# Altium PCB battery_board_v2(1).PcbDoc (part 1 of 2)
Units mm, origin at the board's own origin, x right, y up, seen from the top; angles counter-clockwise.
Board outline 90.17 x 96.01 mm, 4 copper layers (F.Cu, In1.Cu, In2.Cu, B.Cu); 129 components, 185 nets, 704 pads, 113 vias.
Unrouted connection lines stored in the file: 18.
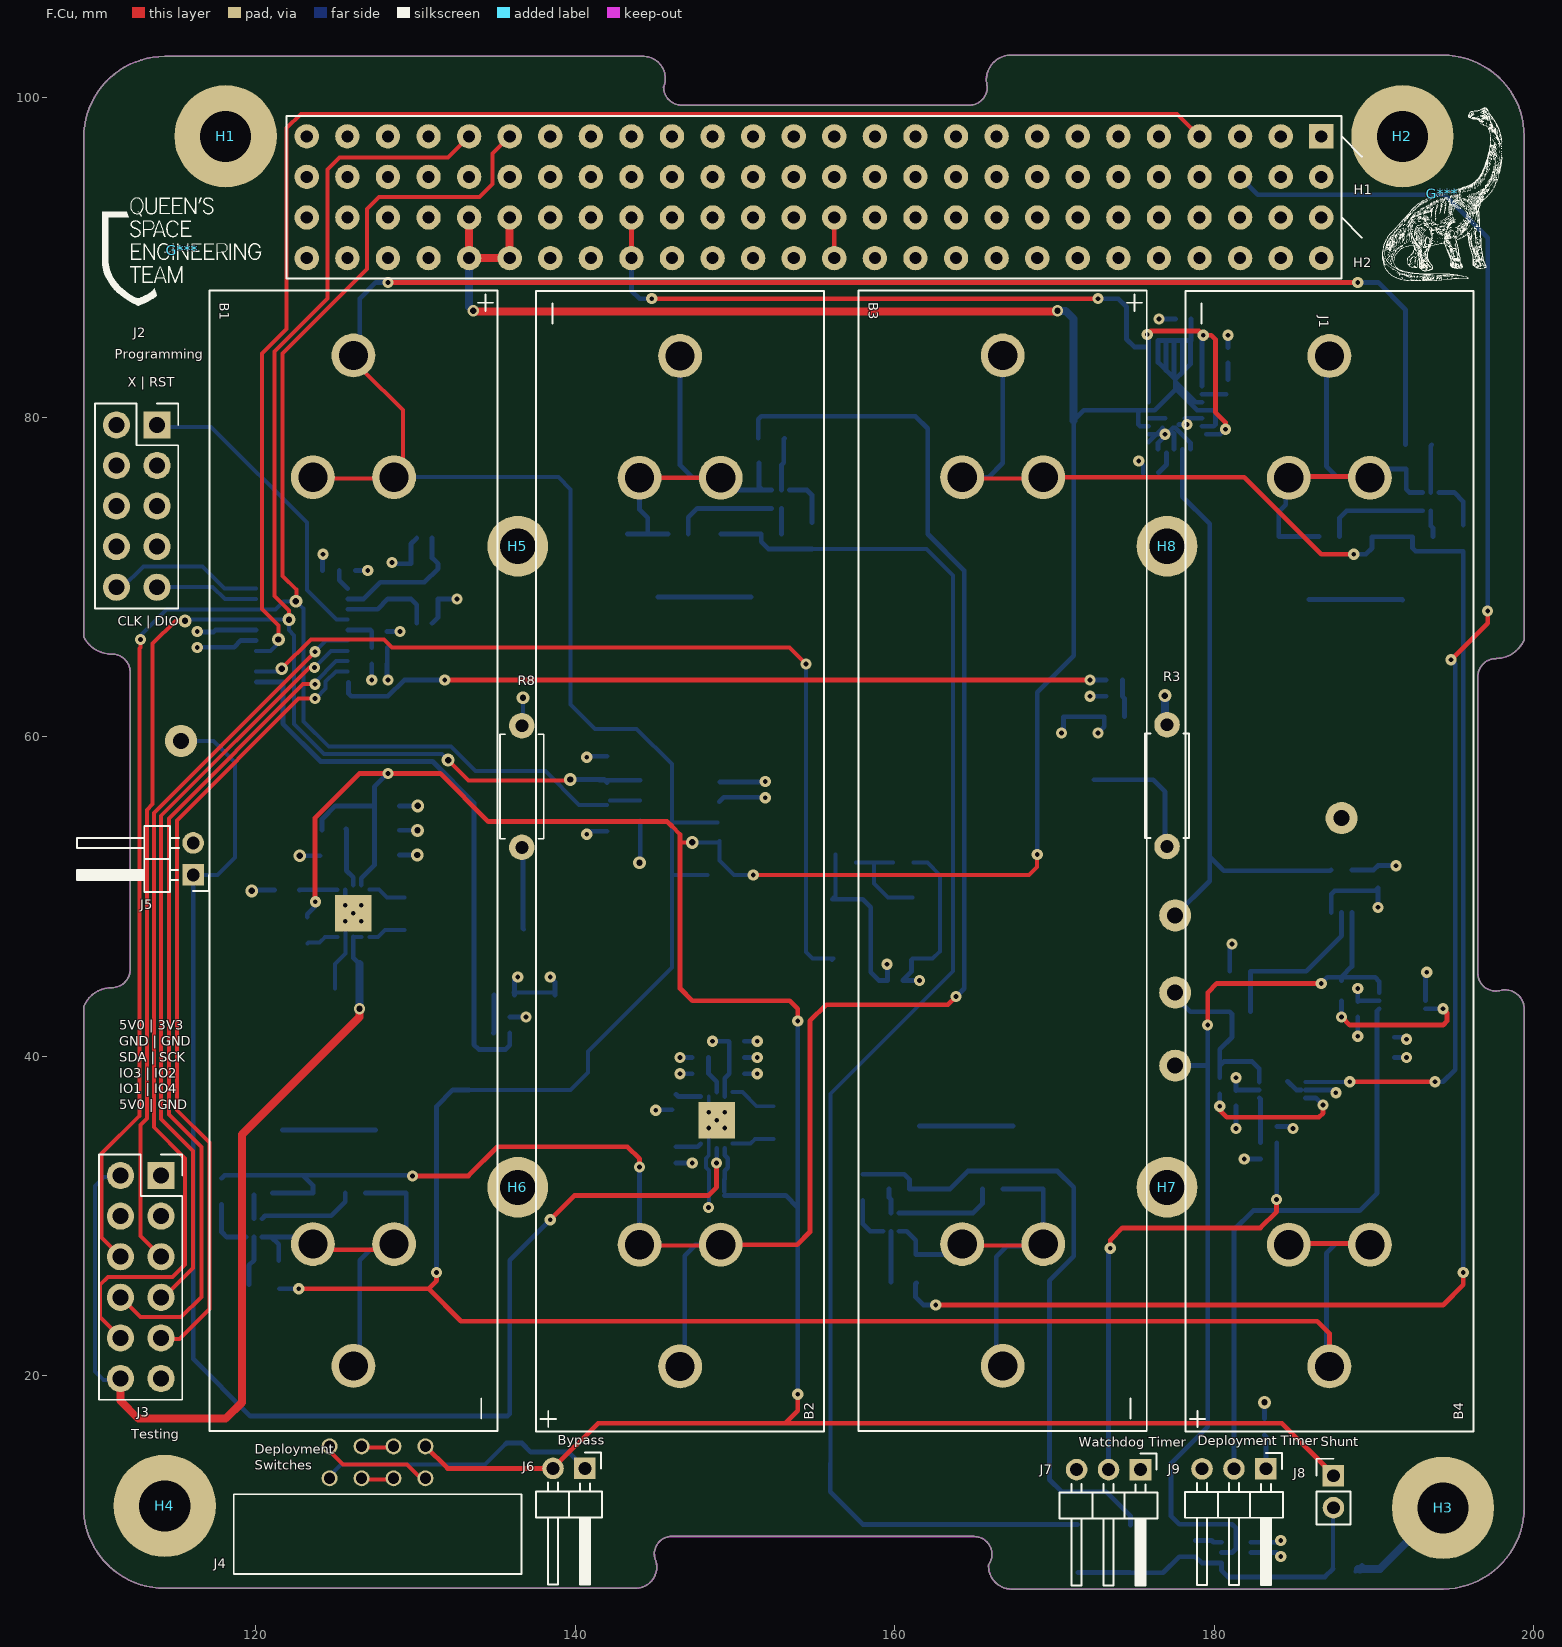
[diagram p0: F.Cu view]
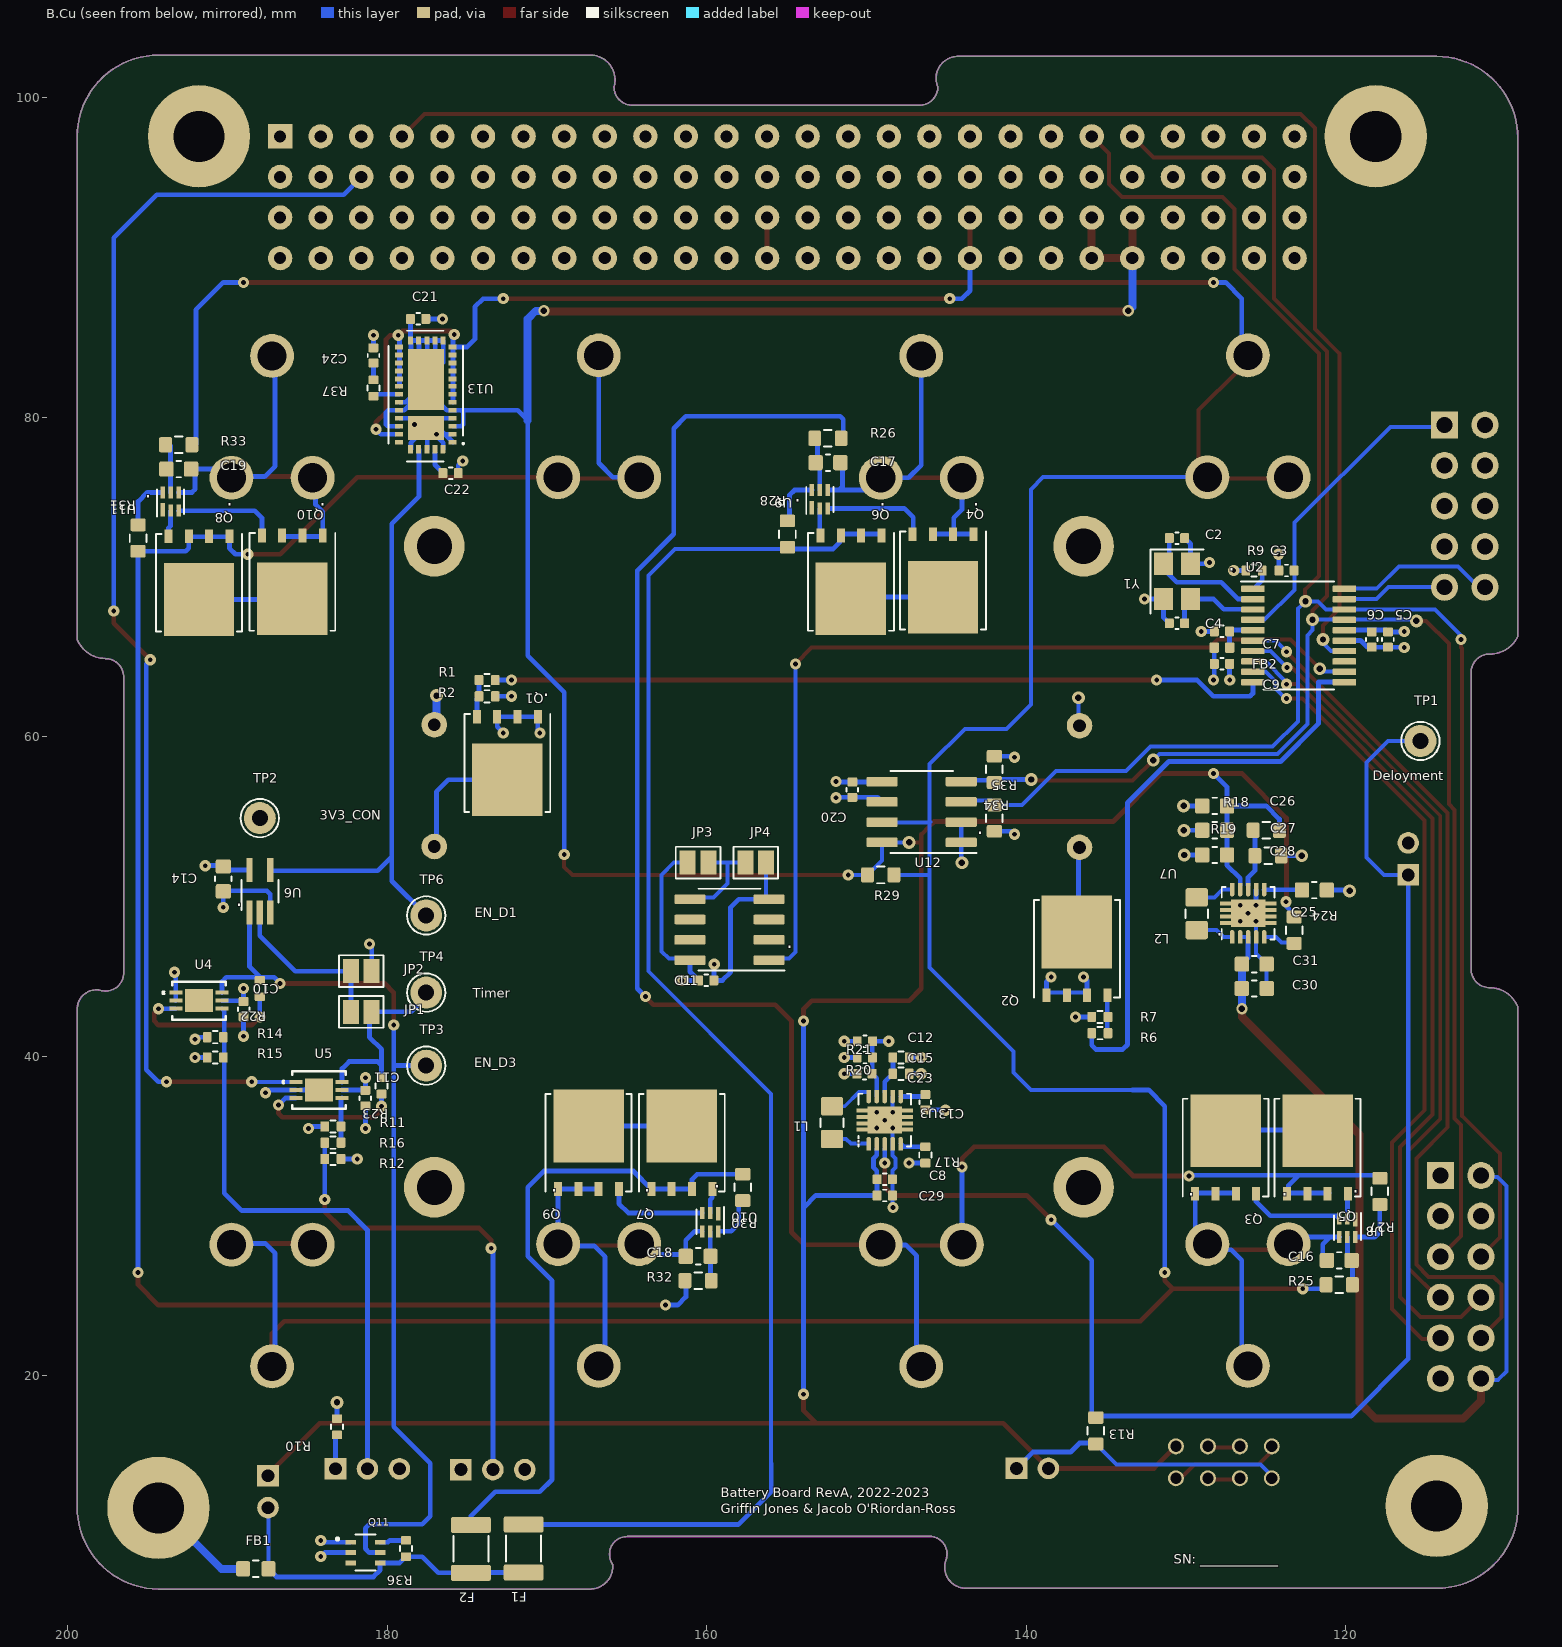
[diagram p1: B.Cu view, seen from below]
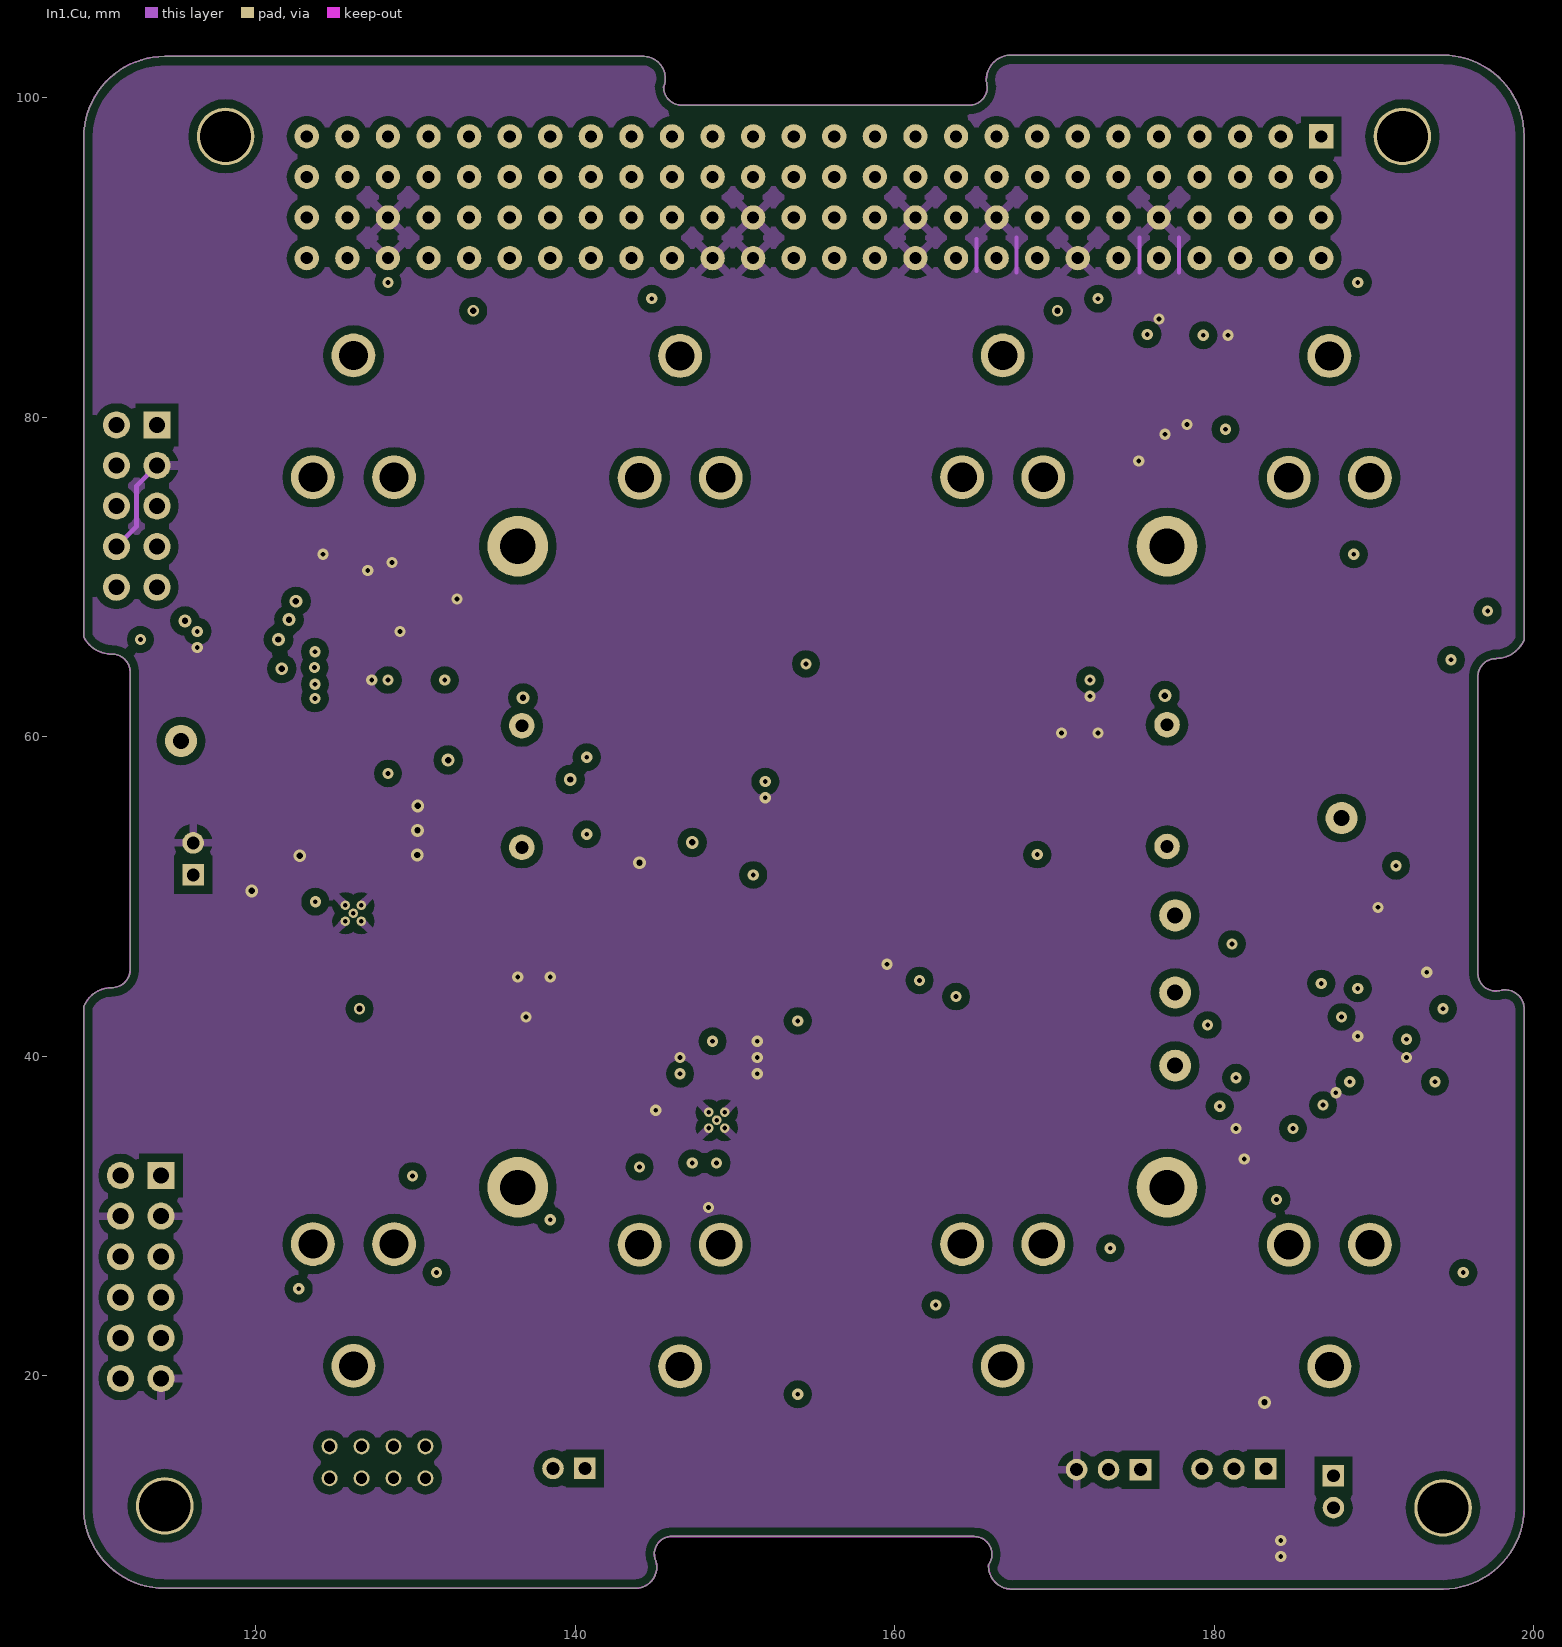
[diagram p2: In1.Cu]
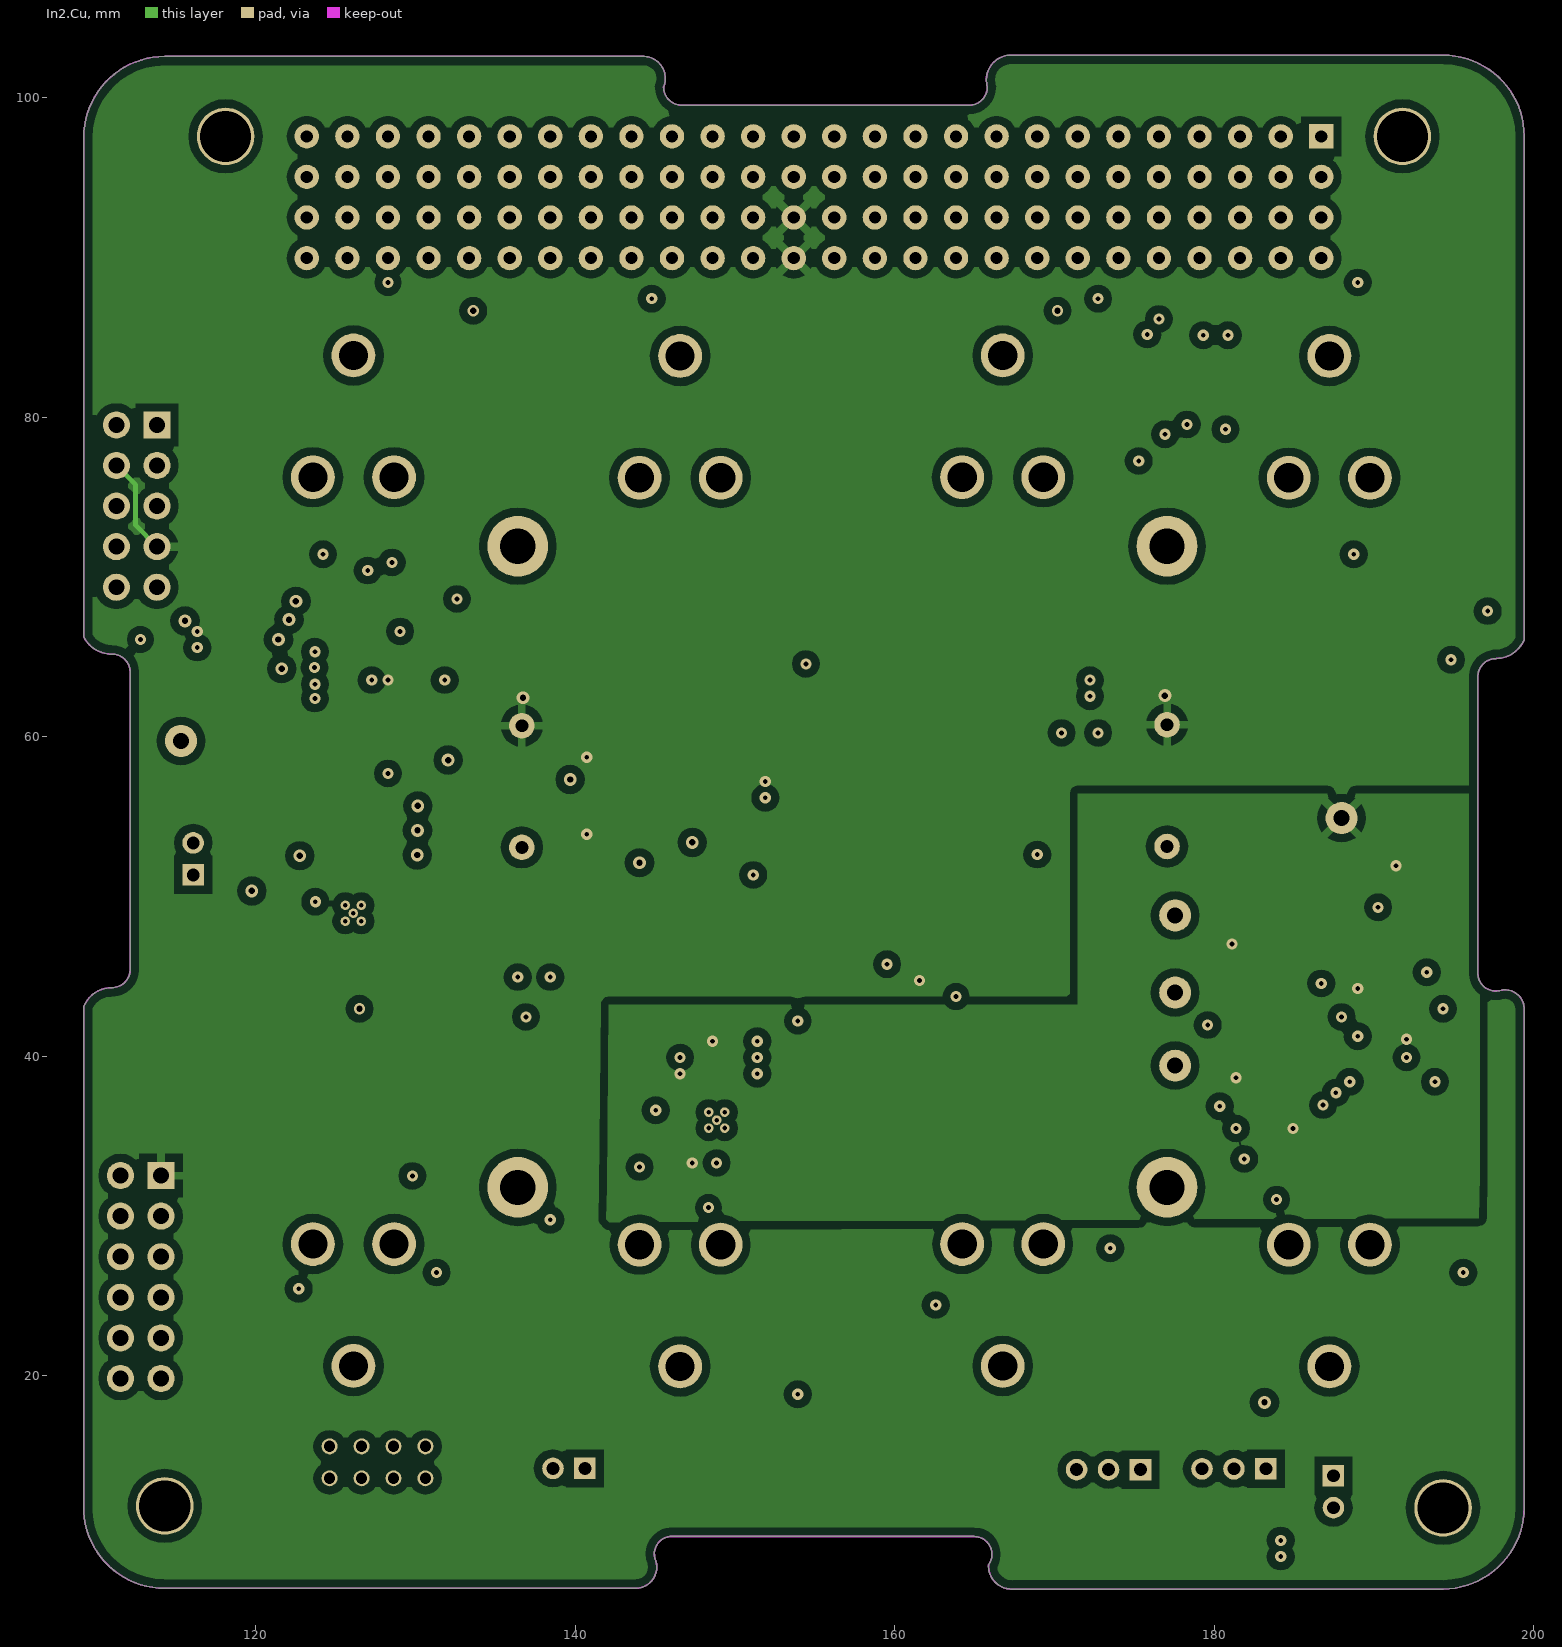
[diagram p3: In2.Cu]

## Layer stack, top to bottom
F.Mask: solder mask 0.0102, Solder Resist, Dk 3.5
F.Cu: signal copper 0.0356
Dielectric 1: dielectric 0.32, FR-4, Dk 4.8
In1.Cu: signal copper 0.0356
Dielectric2: dielectric 0.32, FR-4, Dk 4.8
In2.Cu: signal copper 0.0356
Dielectric3: dielectric 0.32, FR-4, Dk 4.8
B.Cu: signal copper 0.0356
B.Mask: solder mask 0.0102, Solder Resist, Dk 3.5

## Board outline
109.224,66.273 109.224,97.515 cw(c114.304,97.515) 114.304,102.595 144.322,102.595 cw(c144.259,101.226) 145.519,100.686 ccw(c146.662,100.686) 146.662,99.543 164.65,99.543 ccw(c164.65,100.686) 165.793,100.686 cw(c167.274,101.133) 194.31,102.673 cw(c194.31,97.593) 199.39,97.593 199.39,66.093 cw(c197.606,66.841) 197.633,64.907 ccw(c197.633,63.764) 196.49,63.764 196.49,45.222 ccw(c197.611,45.213) 197.866,44.122 cw(c198.199,42.979) 199.39,42.979 199.394,11.79 cw(c194.265,11.79) 194.31,6.661 167.386,6.661 cw(c167.306,8.105) 165.862,8.185 ccw(c164.96,8.839) 164.965,9.953 145.915,9.953 ccw(c146.041,8.866) 145.034,8.439 cw(c143.768,8.038) 143.768,6.71 114.304,6.71 cw(c114.304,11.799) 109.224,11.487 109.224,43.113 cw(c110.997,42.399) 110.997,44.31 ccw(c110.997,45.453) 112.14,45.453 112.14,64.041 ccw(c110.997,64.041) 111.011,65.184 cw(c110.977,67.139) 109.224,66.273

## Design rules (kind name [scope] priority, off if disabled: settings)
Clearance "Clearence 0.508_Polygon" [InNamedPolygon('In1.Cu-GND') OR InNamedPolygon('In2.Cu-3V3BUS') OR InNamedPolygon('In2.Cu-3V3_CON')] p1: gap=0.508 ignorepadtopadclearanceinfootprint=FALSE
MinimumSolderMaskSliver [All] p1: minsoldermaskwidth=0
PolygonConnect Polygon_In2.Cu-3V3_CON_ConnectDirect [IsNamedPolygon('In2.Cu-3V3_CON') vs IsVia] p1: connectstyle=Direct reliefconductorwidth=0.254 reliefentries=4 polygonreliefangle="90 Angle" airgapwidth=0.254
PolygonConnect Polygon_In2.Cu-3V3_CON_ConnectRelief45 [IsNamedPolygon('In2.Cu-3V3_CON') vs (IsThruPin or IsSMTPin) and (PadShape_AllLayers = 'Round')] p2: connectstyle=Relief reliefconductorwidth=0.508 reliefentries=4 polygonreliefangle="45 Angle" airgapwidth=0.508
PolygonConnect Polygon_In2.Cu-3V3_CON_ConnectRelief90 [IsNamedPolygon('In2.Cu-3V3_CON') vs (IsThruPin or IsSMTPin) and (PadShape_AllLayers <> 'Round')] p3: connectstyle=Relief reliefconductorwidth=0.508 reliefentries=4 polygonreliefangle="90 Angle" airgapwidth=0.508
PolygonConnect Polygon_In2.Cu-3V3BUS_ConnectDirect [IsNamedPolygon('In2.Cu-3V3BUS') vs IsVia] p4: connectstyle=Direct reliefconductorwidth=0.254 reliefentries=4 polygonreliefangle="90 Angle" airgapwidth=0.254
PolygonConnect Polygon_In2.Cu-3V3BUS_ConnectRelief45 [IsNamedPolygon('In2.Cu-3V3BUS') vs (IsThruPin or IsSMTPin) and (PadShape_AllLayers = 'Round')] p5: connectstyle=Relief reliefconductorwidth=0.508 reliefentries=4 polygonreliefangle="45 Angle" airgapwidth=0.508
PolygonConnect Polygon_In2.Cu-3V3BUS_ConnectRelief90 [IsNamedPolygon('In2.Cu-3V3BUS') vs (IsThruPin or IsSMTPin) and (PadShape_AllLayers <> 'Round')] p6: connectstyle=Relief reliefconductorwidth=0.508 reliefentries=4 polygonreliefangle="90 Angle" airgapwidth=0.508
PolygonConnect Polygon_In1.Cu-GND_ConnectDirect [IsNamedPolygon('In1.Cu-GND') vs IsVia] p7: connectstyle=Direct reliefconductorwidth=0.254 reliefentries=4 polygonreliefangle="90 Angle" airgapwidth=0.254
PolygonConnect Polygon_In1.Cu-GND_ConnectRelief45 [IsNamedPolygon('In1.Cu-GND') vs (IsThruPin or IsSMTPin) and (PadShape_AllLayers = 'Round')] p8: connectstyle=Relief reliefconductorwidth=0.508 reliefentries=4 polygonreliefangle="45 Angle" airgapwidth=0.508
PolygonConnect Polygon_In1.Cu-GND_ConnectRelief90 [IsNamedPolygon('In1.Cu-GND') vs (IsThruPin or IsSMTPin) and (PadShape_AllLayers <> 'Round')] p9: connectstyle=Relief reliefconductorwidth=0.508 reliefentries=4 polygonreliefangle="90 Angle" airgapwidth=0.508
RoutingVias [All] p1: holewidth=0.711 width=1.27 viastyle="Through Hole" minholewidth=0.711 minwidth=1.27 maxholewidth=0.711 maxwidth=1.27
SilkToSilkClearance [All] p1: silktosilkclearance=0
SilkToSolderMaskClearance [IsPad] p1: minsilkscreentomaskgap=0 clearancetoexposedcopper=TRUE
SolderMaskExpansion [All] p1: expansion=0.102 istentingtop=FALSE
Width [All] p1: maxlimit=10 minlimit=0.254 preferedwidth=0.254 minimp=50.000000 maximp=50.000000 favimp=50.000000
27 further rules are at their usual default settings.

## Components (designator, comment, footprint, x,y, rotation, side; value= is the part's Value field where it differs from the comment)
B1 "NCR18650GA" Keystone_54_18650 117.094,87.941 r270 top
B2 "NCR18650GA" Keystone_54_18650 155.575,16.535 r90 top
B3 "NCR18650GA" Keystone_54_18650 157.734,87.941 r270 top
B4 "NCR18650GA" Keystone_54_18650 196.215,16.535 r90 top
C1 "0.1u" C_0402_1005Metric 160.02,44.761 r0 bottom
C2 "10p" C_0402_1005Metric 130.556,72.447 r0 bottom
C3 "10u" C_0402_1005Metric 123.698,70.415 r180 bottom
C4 "10p" C_0402_1005Metric 130.556,67.113 r180 bottom
C5 "10u" C_0402_1005Metric 117.348,66.097 r90 bottom
C6 "100n" C_0402_1005Metric 118.364,66.097 r90 bottom
C7 "10n" C_0402_1005Metric 127.739,66.605 r180 bottom
C8 "22 uF" C_0402_1005Metric 148.844,32.315 r0 bottom
C9 "1u" C_0402_1005Metric 127.739,64.573 r0 bottom
C10 "0.1u" C_0402_1005Metric 188.976,42.955 r90 bottom
C11 "0.1u" C_0402_1005Metric 181.356,37.395 r90 bottom
C12 "22 uF" C_0402_1005Metric 150.086,40.951 r180 bottom
C13 "0.1 uF" C_0402_1005Metric 146.304,37.141 r90 bottom
C14 "0.1u" C_0603_1608Metric 190.246,51.111 r270 bottom
C15 "22 uF" C_0402_1005Metric 150.086,39.935 r180 bottom
C16 "0.1u" C_0603_1608Metric 120.396,27.235 r0 bottom
C17 "0.1u" C_0603_1608Metric 152.4,77.167 r180 bottom
C18 "0.1u" C_0603_1608Metric 160.528,27.489 r0 bottom
C19 "0.1u" C_0603_1608Metric 193.04,76.765 r180 bottom
C20 "0.1u" C_0402_1005Metric 150.876,56.699 r270 bottom
C21 "0.1u" C_0402_1005Metric 178.054,86.163 r0 bottom
C22 "22n" C_0402_1005Metric 176.022,76.511 r0 bottom
C23 "22 uF" C_0402_1005Metric 150.114,38.919 r180 bottom
C24 "1nF" C_0402_1005Metric 180.848,83.877 r270 bottom
C25 "0.1 uF" C_0603_1608Metric 121.95,50.413 r0 bottom
C26 "22 uF" C_0603_1608Metric 128.2,55.683 r180 bottom
C27 "22 uF" C_0603_1608Metric 128.2,54.159 r180 bottom
C28 "22 uF" C_0603_1608Metric 128.2,52.613 r180 bottom
C29 "22 uF" C_0402_1005Metric 148.844,31.299 r0 bottom
C30 "22 uF" C_0603_1608Metric 125.717,44.253 r0 bottom
C31 "22 uF" C_0603_1608Metric 125.717,45.777 r0 bottom
F1 "1210L450/12SLWR" 1210L450-polyfuse 171.45,9.201 r90 bottom
F2 "1210L450/12SLWR" 1210L450-polyfuse 174.752,9.177 r90 bottom
FB1 "100R @ 100 MHz" L_0603_1608Metric 188.214,7.931 r0 bottom
FB2 "100R @ 100MHz" L_0402_1005Metric 127.739,65.589 r180 bottom
G*** "LOGO" Logo-10mm 115.38,90.473 r0 top
G*** "LOGO" LOGO 194.25,93.988 r0 top
H1 "MountingHole_Pad" MountingHole_3.2mm_M3_Pad_TopBottom 118.11,97.593 r0 top
H2 "MountingHole_Pad" MountingHole_3.2mm_M3_Pad_TopBottom 191.77,97.593 r0 top
H3 "MountingHole_Pad" MountingHole_3.2mm_M3_Pad_TopBottom 194.31,11.741 r0 top
H4 "MountingHole_Pad" MountingHole_3.2mm_M3_Pad_TopBottom 114.3,11.868 r0 top
H5 "MountingHole" MountingHole_2.2mm_M2_DIN965_Pad 136.398,71.939 r0 top
H6 "MountingHole" MountingHole_2.2mm_M2_DIN965_Pad 136.398,31.807 r0 top
H7 "MountingHole" MountingHole_2.2mm_M2_DIN965_Pad 177.038,31.807 r0 top
H8 "MountingHole" MountingHole_2.2mm_M2_DIN965_Pad 177.038,71.939 r0 top
J1 "PC104_Connector" pc104-connector 156.21,95.053 r270 top
J2 "Programming Header" PinSocket_2x05_P2.54mm_Vertical 113.812,79.529 r0 top
J3 "System Test Connector" PinSocket_2x06_P2.54mm_Vertical 114.066,32.544 r0 top
J4 "Conn_01x08_Male" M80-5300842 118.618,7.596 r0 top
J5 "RBF" PinHeader_1x02_P2.00mm_Horizontal 116.078,51.365 r180 top
J6 "Deployment Switch Bypass" PinHeader_1x02_P2.00mm_Horizontal 140.6,14.213 r270 top
J7 "Watchdog Timer" PinHeader_1x03_P2.00mm_Horizontal 175.375,14.138 r270 top
J8 "Shunt Resistor" PinHeader_1x02_P2.00mm_Vertical 187.452,13.757 r0 top
J9 "Deployment Timer" PinHeader_1x03_P2.00mm_Horizontal 183.225,14.188 r270 top
JP1 "Watchdog Disable" SolderJumper-2_P1.3mm_Open_Pad1.0x1.5mm 181.608,42.795 r0 bottom
JP2 "D1 Pull-Up" SolderJumper-2_P1.3mm_Open_Pad1.0x1.5mm 181.608,45.335 r0 bottom
JP3 "Temp Sensor Disable" SolderJumper-2_P1.3mm_Open_Pad1.0x1.5mm 160.528,52.127 r180 bottom
JP4 "Temp Sensor Enable" SolderJumper-2_P1.3mm_Open_Pad1.0x1.5mm 156.92,52.127 r180 bottom
L1 "2.2uH" L_0805_2012Metric_Pad1.15x1.40mm_HandSolder 152.146,35.858 r270 bottom
L2 "2.2uH" L_0805_2012Metric_Pad1.15x1.40mm_HandSolder 129.32,48.933 r270 bottom
Q1 "CSD16401Q5" TDSON-8-1#1 172.466,58.365 r90 bottom
Q2 "CSD16401Q5" TDSON-8-1#2 136.818,46.739 r270 bottom
Q3 "CSD16406Q3" TDSON-8-1#3 127.508,34.293 r270 bottom
Q4 "CSD16406Q3" TDSON-8-1#4 145.2,69.795 r90 bottom
Q5 "CSD16406Q3" TDSON-8-1#5 121.754,34.293 r270 bottom
Q6 "CSD16406Q3" TDSON-8-1#6 150.964,69.707 r90 bottom
Q7 "CSD16406Q3" TDSON-8-1#7 161.544,34.601 r270 bottom
Q8 "CSD16406Q3" TDSON-8-1#8 191.77,69.653 r90 bottom
Q9 "CSD16406Q3" TDSON-8-1#9 167.386,34.601 r270 bottom
Q10 "CSD16406Q3" TDSON-8-1#10 185.928,69.707 r90 bottom
Q11 "NTJD1155LT1G" TRANS_NTJD1155LT1G 181.356,8.947 r0 bottom
R1 "100" R_0402_1005Metric 173.736,63.557 r180 bottom
R2 "10k" R_0402_1005Metric 173.736,62.541 r180 bottom
R3 "100" R_Axial_DIN0207_L6.3mm_D2.5mm_P7.62mm_Horizontal 177.038,53.143 r90 top
R6 "100" R_0402_1005Metric 135.382,41.459 r0 bottom
R7 "10k" R_0402_1005Metric 135.382,42.475 r0 bottom
R8 "100" R_Axial_DIN0207_L6.3mm_D2.5mm_P7.62mm_Horizontal 136.652,53.086 r90 top
R9 "10k" R_0402_1005Metric 125.73,70.415 r180 bottom
R10 "920k" R_0402_1005Metric 183.134,16.821 r270 bottom
R11 "1M" R_0402_1005Metric 183.388,35.617 r0 bottom
R12 "112k" R_0402_1005Metric 183.388,33.585 r0 bottom
R13 "1 M" R_0603_1608Metric 135.636,16.567 r270 bottom
R14 "1M" R_0402_1005Metric 190.754,41.205 r0 bottom
R15 "681k" R_0402_1005Metric 190.754,39.935 r180 bottom
R16 "280k" R_0402_1005Metric 183.388,34.601 r180 bottom
R17 "1 M" R_0402_1005Metric 146.304,33.839 r270 bottom
R18 "1M" R_0603_1608Metric 124.968,54.159 r180 bottom
R19 "63.2k" R_0603_1608Metric 124.85,52.563 r0 bottom
R20 "560k" R_0402_1005Metric 147.828,38.919 r180 bottom
R21 "100k" R_0402_1005Metric 147.828,39.935 r0 bottom
R22 "681k" R_0402_1005Metric 187.96,44.253 r90 bottom
R23 "238k" R_0402_1005Metric 180.34,38.157 r90 bottom
R24 "1 M" R_0603_1608Metric 123.22,47.903 r90 bottom
R25 "330" R_0603_1608Metric 120.396,25.711 r0 bottom
R26 "330" R_0603_1608Metric 152.4,78.691 r180 bottom
R27 "2.2k" R_0603_1608Metric 117.856,31.553 r270 bottom
R28 "2.2k" R_0603_1608Metric 154.94,72.701 r90 bottom
R29 "0.1" R_0603_1608Metric 149.098,51.365 r0 bottom
R30 "2.2k" R_0603_1608Metric 157.734,31.807 r270 bottom
R31 "2.2k" R_0603_1608Metric 195.58,72.447 r90 bottom
R32 "330" R_0603_1608Metric 160.528,25.965 r0 bottom
R33 "330" R_0603_1608Metric 193.04,78.289 r180 bottom
R34 "DNP" R_0603_1608Metric 141.986,57.969 r270 bottom
R35 "DNP" R_0603_1608Metric 141.986,54.921 r90 bottom
R36 "10k" R_0402_1005Metric 178.816,9.201 r270 bottom
R37 "1k" R_0402_1005Metric 180.848,81.845 r270 bottom
TP1 "Deployment TP" TestPoint_THTPad_D2.0mm_Drill1.0mm 115.316,59.747 r0 bottom
TP2 "Power Control TP" TestPoint_THTPad_D2.0mm_Drill1.0mm 187.96,54.921 r0 bottom
TP3 "EN_D3" TestPoint_THTPad_D2.0mm_Drill1.0mm 177.546,39.427 r0 bottom
TP4 "Timer" TestPoint_THTPad_D2.0mm_Drill1.0mm 177.546,43.999 r0 bottom
TP6 "EN_D1" TestPoint_THTPad_D2.0mm_Drill1.0mm 177.546,48.825 r0 bottom
U1 "TMP36" SOIC-8_3.9x4.9mm_P1.27mm 158.561,47.936 r180 bottom
U2 "STM32F030F4P6" TSSOP-20_4.4x6.5mm_P0.65mm 122.936,66.351 r0 bottom
U3 "TPS63060" Texas_S-PWSON-N10_ThermalVias 148.85,36.013 r270 bottom
U4 "LTC6995HS6-1#TRMPBF" DFN-6_DCB_LIT 191.77,43.491 r0 bottom
U5 "LTC6995HS6-1#TRMPBF" DFN-6_DCB_LIT 184.26,37.903 r0 bottom
U6 "74AUP1G08" SOT-353_SC-70-5_Handsoldering 187.96,50.349 r270 bottom
U7 "TPS63060" Texas_S-PWSON-N10_ThermalVias 126.1,48.963 r270 bottom
U8 "BQ29723" WSON-6_1.5x1.5mm_P0.5mm 119.888,29.267 r90 bottom
U9 "BQ29723" WSON-6_1.5x1.5mm_P0.5mm 152.908,74.881 r270 bottom
U10 "BQ29723" WSON-6_1.5x1.5mm_P0.5mm 159.766,29.633 r90 bottom
U11 "BQ29723" WSON-6_1.5x1.5mm_P0.5mm 193.548,74.733 r270 bottom
U12 "INA219AIDR" SOIC-8_3.9x4.9mm_P1.27mm 146.535,55.302 r180 bottom
U13 "TPS24750" TPS24750 177.724,81.667 r270 bottom
Y1 "16 MHz" Crystal_SMD_3225-4Pin_3.2x2.5mm 130.556,69.737 r90 bottom

## Footprints (in the part's own frame and the unit in brackets; to place one, negate y for a bottom-side part, rotate by r counter-clockwise, add the part's x,y. Pads: shape width x height; smd on the part's side, far side on the other; paste and mask are expansions set on the pad)
1210L450-polyfuse [mm]
  rrect23% 0.998x2.5 smd mask+0: 1(1.5,0) 2(-1.5,0)
  silkscreen extent -0.8,-1.09 0.8,1.09
C_0402_1005Metric [mm]
  rrect25% 0.56x0.62 smd mask+0: 1(0.48,0) 2(-0.48,0)
  silkscreen extent -0.11,-0.36 0.11,0.36
C_0603_1608Metric [mm]
  rrect25% 0.9x0.95 smd mask+0: 1(0.775,0) 2(-0.775,0)
  silkscreen extent -0.14,-0.51 0.14,0.51
Crystal_SMD_3225-4Pin_3.2x2.5mm [mm]
  rect 1.4x1.2 smd mask+0: 1(1.1,0.85) 2(-1.1,0.85) 3(-1.1,-0.85) 4(1.1,-0.85)
  silkscreen extent -2,-1.65 2,1.65
DFN-6_DCB_LIT [mil]
  rect 32x10 smd mask+0: 1(57,-19.69) 2(57,0) 3(57,19.68) 4(-57,19.68) 5(-57,0) 6(-57,-19.69)
  rect 69x57 smd mask+0: 7(0,0)
  silkscreen extent -66,-46 90,46
Keystone_54_18650 [mm]
  round 2.745 hole 1.83 paste-2539.97 mask+0: 1(4.064,9.017) 1(11.684,6.477) 1(11.684,11.557) 2(59.684,6.477) 2(59.684,11.557) 2(67.31,9.017)
  silkscreen extent 0,0 71.37,18.03
L_0402_1005Metric [mm]
  rrect25% 0.59x0.64 smd mask+0: 1(0.485,0) 2(-0.485,0)
L_0603_1608Metric [mm]
  rrect25% 0.875x0.95 smd mask+0: 1(0.787,0) 2(-0.787,0)
  silkscreen extent -0.16,-0.51 0.16,0.51
L_0805_2012Metric_Pad1.15x1.40mm_HandSolder [mm]
  rrect22% 1.15x1.4 smd mask+0: 1(1.025,0) 2(-1.025,0)
  silkscreen extent -0.26,-0.71 0.26,0.71
LOGO [mm]
  silkscreen extent -3.74,-5.43 3.75,5.41
Logo-10mm [mm]
  silkscreen extent -5,-3.48 4.95,3.29
M80-5300842 [mm]
  round 1 hole 0.7 paste-2539.97 mask+0: 1(12,8) 2(10,8) 3(8,8) 4(6,8) 5(12,6) 6(10,6) 7(8,6) 8(6,6)
  silkscreen extent 0,0 18,5
MountingHole_2.2mm_M2_DIN965_Pad [mm]
  round 3.8 hole 2.2 paste-2539.97 mask+0: 1(0,0)
MountingHole_3.2mm_M3_Pad_TopBottom [mm]
  round 3.6 hole 3.2 paste-2539.97 mask+0: 1(0,0)
  round 6.4 smd far side paste-6.4 mask+0: 1(0,0)
  round 6.4 smd paste-6.4 mask+0: 1(0,0)
pc104-connector [mil]
  rect 60x60 hole 30 paste-99999 mask+0: 1(-100,1200)
  round 60 hole 30 paste-99999 mask+0: 2(0,1200) 3(-100,1100) 4(0,1100) 5(-100,1000) 6(0,1000) 7(-100,900) 8(0,900) 9(-100,800) 10(0,800) 11(-100,700) 12(0,700) 13(-100,600) 14(0,600) 15(-100,500) 16(0,500) 17(-100,400) 18(0,400) 19(-100,300) 20(0,300) 21(-100,200) 22(0,200) 23(-100,100) 24(0,100) 25(-100,0) 26(0,0) 27(-100,-100) 28(0,-100) 29(-100,-200) 30(0,-200) 31(-100,-300) 32(0,-300) 33(-100,-400) 34(0,-400) 35(-100,-500) 36(0,-500) 37(-100,-600) 38(0,-600) 39(-100,-700) 40(0,-700) 41(-100,-800) 42(0,-800) 43(-100,-900) 44(0,-900) 45(-100,-1000) 46(0,-1000) 47(-100,-1100) 48(0,-1100) 49(-100,-1200) 50(0,-1200) 51(-100,-1300) 52(0,-1300) 53(100,1200) 54(200,1200) 55(100,1100) 56(200,1100) 57(100,1000) 58(200,1000) 59(100,900) 60(200,900) 61(100,800) 62(200,800) 63(100,700) 64(200,700) 65(100,600) 66(200,600) 67(100,500) 68(200,500) 69(100,400) 70(200,400) 71(100,300) 72(200,300) 73(100,200) 74(200,200) 75(100,100) 76(200,100) 77(100,0) 78(200,0) 79(100,-100) 80(200,-100) 81(100,-200) 82(200,-200) 83(100,-300) 84(200,-300) 85(100,-400) 86(200,-400) 87(100,-500) 88(200,-500) 89(100,-600) 90(200,-600) 91(100,-700) 92(200,-700) 93(100,-800) 94(200,-800) 95(100,-900) 96(200,-900) 97(100,-1000) 98(200,-1000) 99(100,-1100) 100(200,-1100) 101(100,-1200) 102(200,-1200) 103(100,-1300) 104(200,-1300)
  silkscreen extent -150,-1350 250,1300
PinHeader_1x02_P2.00mm_Horizontal [mm]
  rect 1.35x1.35 hole 0.8 paste-2539.97 mask+0: 1(0,0)
  rrect100% 1.35x1.35 hole 0.8 paste-2539.97 mask+0: 2(0,-2)
  silkscreen extent -1,-3.06 7.26,1.06
PinHeader_1x02_P2.00mm_Vertical [mm]
  rect 1.35x1.35 hole 0.8 paste-2539.97 mask+0: 1(0,0)
  rrect100% 1.35x1.35 hole 0.8 paste-2539.97 mask+0: 2(0,-2)
  silkscreen extent -1.06,-3.06 1.06,1.06
PinHeader_1x03_P2.00mm_Horizontal [mm]
  rect 1.35x1.35 hole 0.8 paste-2539.97 mask+0: 1(0,0)
  rrect100% 1.35x1.35 hole 0.8 paste-2539.97 mask+0: 2(0,-2) 3(0,-4)
  silkscreen extent -1,-5.06 7.26,1.06
PinSocket_2x05_P2.54mm_Vertical [mm]
  rect 1.7x1.7 hole 1 paste-2539.97 mask+0: 1(0,0)
  rrect100% 1.7x1.7 hole 1 paste-2539.97 mask+0: 2(-2.54,0) 3(0,-2.54) 4(-2.54,-2.54) 5(0,-5.08) 6(-2.54,-5.08) 7(0,-7.62) 8(-2.54,-7.62) 9(0,-10.16) 10(-2.54,-10.16)
  silkscreen extent -3.87,-11.49 1.33,1.33
PinSocket_2x06_P2.54mm_Vertical [mm]
  rect 1.7x1.7 hole 1 paste-2539.97 mask+0: 1(0,0)
  rrect100% 1.7x1.7 hole 1 paste-2539.97 mask+0: 2(-2.54,0) 3(0,-2.54) 4(-2.54,-2.54) 5(0,-5.08) 6(-2.54,-5.08) 7(0,-7.62) 8(-2.54,-7.62) 9(0,-10.16) 10(-2.54,-10.16) 11(0,-12.7) 12(-2.54,-12.7)
  silkscreen extent -3.87,-14.03 1.33,1.33
R_0402_1005Metric [mm]
  rrect25% 0.54x0.64 smd mask+0: 1(0.51,0) 2(-0.51,0)
  silkscreen extent -0.15,-0.38 0.15,0.38
R_0603_1608Metric [mm]
  rrect25% 0.8x0.95 smd mask+0: 1(0.825,0) 2(-0.825,0)
  silkscreen extent -0.24,-0.52 0.24,0.52
R_Axial_DIN0207_L6.3mm_D2.5mm_P7.62mm_Horizontal [mm]
  round 1.6 hole 0.8 paste-2539.97 mask+0: 1(0,0)
  rrect100% 1.6x1.6 hole 0.8 paste-2539.97 mask+0: 2(7.62,0)
  silkscreen extent 0.54,-1.37 7.08,1.37
SOIC-8_3.9x4.9mm_P1.27mm [mm]
  rrect25% 1.95x0.6 smd mask+0: 1(2.475,-1.905) 2(2.475,-0.635) 3(2.475,0.635) 4(2.475,1.905) 5(-2.475,1.905) 6(-2.475,0.635) 7(-2.475,-0.635) 8(-2.475,-1.905)
  silkscreen extent -1.95,-2.56 3.45,2.56
SolderJumper-2_P1.3mm_Open_Pad1.0x1.5mm [mm]
  rect 1x1.5 smd paste-1.5 mask+0: 1(0.65,0) 2(-0.65,0)
  silkscreen extent -1.4,-1 1.4,1
SOT-353_SC-70-5_Handsoldering [mm]
  rect 1.5x0.4 smd mask+0: 1(1.33,-0.65) 2(1.33,0) 3(1.33,0.65) 4(-1.33,0.65) 5(-1.33,-0.65)
  silkscreen extent -0.7,-1.16 1.2,1.16
TDSON-8-1#1 [mm]
  rect 0.85x0.5 smd paste-0.05 mask+0: 1(2.9,-1.905) 2(2.9,-0.635) 3(2.9,0.635) 4(2.9,1.905)
  rect 4.55x4.41 smd paste-4.55 mask-4.55: 5(-1.05,0)
  rect 0.75x0.5 on Bottom Paste mask-0.75: Un1(-2.905,0.635) Un2(-2.905,-0.635) Un3(-2.905,1.905) Un7(-2.905,-1.905)
  rect 1.5x1.5 on Bottom Paste mask-1.5: Un4(-1.5,0.85) Un6(-1.5,-0.85) Un8(0.2,0.85) Un9(0.2,-0.85)
  rect 3.75x4.41 on Bottom Solder paste-4.41 mask-4.41: Un5(-0.65,0)
  silkscreen extent -3.06,-2.69 3.06,2.69
TDSON-8-1#2 [mm]
  rect 0.85x0.5 smd paste-0.05 mask+0: 1(2.9,-1.905) 2(2.9,-0.635) 3(2.9,0.635) 4(2.9,1.905)
  rect 4.55x4.41 smd paste-4.55 mask-4.55: 5(-1.05,0)
  rect 1.5x1.5 on Bottom Paste mask-1.5: Un1(-1.5,-0.85) Un5(0.2,-0.85) Un7(-1.5,0.85) Un8(0.2,0.85)
  rect 3.75x4.41 on Bottom Solder paste-4.41 mask-4.41: Un2(-0.65,0)
  rect 0.75x0.5 on Bottom Paste mask-0.75: Un3(-2.905,-0.635) Un4(-2.905,-1.905) Un6(-2.905,1.905) Un9(-2.905,0.635)
  silkscreen extent -3.06,-2.69 3.06,2.69
TDSON-8-1#3 [mm]
  rect 0.85x0.5 smd paste-0.05 mask+0: 1(2.9,-1.905) 2(2.9,-0.635) 3(2.9,0.635) 4(2.9,1.905)
  rect 4.55x4.41 smd paste-4.55 mask-4.55: 5(-1.05,0)
  rect 0.75x0.5 on Bottom Paste mask-0.75: Un1(-2.905,1.905) Un3(-2.905,-1.905) Un8(-2.905,0.635) Un9(-2.905,-0.635)
  rect 1.5x1.5 on Bottom Paste mask-1.5: Un2(-1.5,-0.85) Un4(0.2,-0.85) Un5(0.2,0.85) Un7(-1.5,0.85)
  rect 3.75x4.41 on Bottom Solder paste-4.41 mask-4.41: Un6(-0.65,0)
  silkscreen extent -3.06,-2.69 3.06,2.69
TDSON-8-1#4 [mm]
  rect 0.85x0.5 smd paste-0.05 mask+0: 1(2.9,-1.905) 2(2.9,-0.635) 3(2.9,0.635) 4(2.9,1.905)
  rect 4.55x4.41 smd paste-4.55 mask-4.55: 5(-1.05,0)
  rect 1.5x1.5 on Bottom Paste mask-1.5: Un1(0.2,-0.85) Un3(0.2,0.85) Un4(-1.5,-0.85) Un8(-1.5,0.85)
  rect 3.75x4.41 on Bottom Solder paste-4.41 mask-4.41: Un2(-0.65,0)
  rect 0.75x0.5 on Bottom Paste mask-0.75: Un5(-2.905,1.905) Un6(-2.905,-1.905) Un7(-2.905,0.635) Un9(-2.905,-0.635)
  silkscreen extent -3.06,-2.69 3.06,2.69
TDSON-8-1#5 [mm]
  rect 0.85x0.5 smd paste-0.05 mask+0: 1(2.9,-1.905) 2(2.9,-0.635) 3(2.9,0.635) 4(2.9,1.905)
  rect 4.55x4.41 smd paste-4.55 mask-4.55: 5(-1.05,0)
  rect 1.5x1.5 on Bottom Paste mask-1.5: Un1(-1.5,-0.85) Un4(0.2,-0.85) Un5(-1.5,0.85) Un6(0.2,0.85)
  rect 0.75x0.5 on Bottom Paste mask-0.75: Un2(-2.905,-0.635) Un7(-2.905,0.635) Un8(-2.905,1.905) Un9(-2.905,-1.905)
  rect 3.75x4.41 on Bottom Solder paste-4.41 mask-4.41: Un3(-0.65,0)
  silkscreen extent -3.06,-2.69 3.06,2.69
TDSON-8-1#6 [mm]
  rect 0.85x0.5 smd paste-0.05 mask+0: 1(2.9,-1.905) 2(2.9,-0.635) 3(2.9,0.635) 4(2.9,1.905)
  rect 4.55x4.41 smd paste-4.55 mask-4.55: 5(-1.05,0)
  rect 0.75x0.5 on Bottom Paste mask-0.75: Un1(-2.905,-0.635) Un5(-2.905,0.635) Un8(-2.905,1.905) Un9(-2.905,-1.905)
  rect 1.5x1.5 on Bottom Paste mask-1.5: Un2(0.2,-0.85) Un3(-1.5,0.85) Un4(0.2,0.85) Un7(-1.5,-0.85)
  rect 3.75x4.41 on Bottom Solder paste-4.41 mask-4.41: Un6(-0.65,0)
  silkscreen extent -3.06,-2.69 3.06,2.69
TDSON-8-1#7 [mm]
  rect 0.85x0.5 smd paste-0.05 mask+0: 1(2.9,-1.905) 2(2.9,-0.635) 3(2.9,0.635) 4(2.9,1.905)
  rect 4.55x4.41 smd paste-4.55 mask-4.55: 5(-1.05,0)
  rect 1.5x1.5 on Bottom Paste mask-1.5: Un1(-1.5,-0.85) Un2(0.2,0.85) Un4(-1.5,0.85) Un5(0.2,-0.85)
  rect 0.75x0.5 on Bottom Paste mask-0.75: Un3(-2.905,1.905) Un6(-2.905,-1.905) Un7(-2.905,-0.635) Un9(-2.905,0.635)
  rect 3.75x4.41 on Bottom Solder paste-4.41 mask-4.41: Un8(-0.65,0)
  silkscreen extent -3.06,-2.69 3.06,2.69
TDSON-8-1#8 [mm]
  rect 0.85x0.5 smd paste-0.05 mask+0: 1(2.9,-1.905) 2(2.9,-0.635) 3(2.9,0.635) 4(2.9,1.905)
  rect 4.55x4.41 smd paste-4.55 mask-4.55: 5(-1.05,0)
  rect 0.75x0.5 on Bottom Paste mask-0.75: Un1(-2.905,0.635) Un2(-2.905,-0.635) Un4(-2.905,-1.905) Un9(-2.905,1.905)
  rect 1.5x1.5 on Bottom Paste mask-1.5: Un3(-1.5,-0.85) Un5(-1.5,0.85) Un7(0.2,-0.85) Un8(0.2,0.85)
  rect 3.75x4.41 on Bottom Solder paste-4.41 mask-4.41: Un6(-0.65,0)
  silkscreen extent -3.06,-2.69 3.06,2.69
TDSON-8-1#9 [mm]
  rect 0.85x0.5 smd paste-0.05 mask+0: 1(2.9,-1.905) 2(2.9,-0.635) 3(2.9,0.635) 4(2.9,1.905)
  rect 4.55x4.41 smd paste-4.55 mask-4.55: 5(-1.05,0)
  rect 0.75x0.5 on Bottom Paste mask-0.75: Un1(-2.905,-1.905) Un2(-2.905,0.635) Un5(-2.905,1.905) Un6(-2.905,-0.635)
  rect 1.5x1.5 on Bottom Paste mask-1.5: Un3(0.2,-0.85) Un4(0.2,0.85) Un7(-1.5,-0.85) Un8(-1.5,0.85)
  rect 3.75x4.41 on Bottom Solder paste-4.41 mask-4.41: Un9(-0.65,0)
  silkscreen extent -3.06,-2.69 3.06,2.69
TDSON-8-1#10 [mm]
  rect 0.85x0.5 smd paste-0.05 mask+0: 1(2.9,-1.905) 2(2.9,-0.635) 3(2.9,0.635) 4(2.9,1.905)
  rect 4.55x4.41 smd paste-4.55 mask-4.55: 5(-1.05,0)
  rect 0.75x0.5 on Bottom Paste mask-0.75: Un1(-2.905,1.905) Un5(-2.905,-1.905) Un6(-2.905,-0.635) Un8(-2.905,0.635)
  rect 1.5x1.5 on Bottom Paste mask-1.5: Un2(-1.5,0.85) Un3(-1.5,-0.85) Un7(0.2,0.85) Un9(0.2,-0.85)
  rect 3.75x4.41 on Bottom Solder paste-4.41 mask-4.41: Un4(-0.65,0)
  silkscreen extent -3.06,-2.69 3.06,2.69
TestPoint_THTPad_D2.0mm_Drill1.0mm [mm]
  round 2 hole 1 paste-2539.97 mask+0: 1(0,0)
  silkscreen extent -1.2,-1.2 1.2,1.2
Texas_S-PWSON-N10_ThermalVias [mm]
  rrect100% 0.85x0.28 smd paste-0.025 mask+0.07: 1(1.475,-1) 2(1.475,-0.5) 3(1.475,0) 4(1.475,0.5) 5(1.475,1) 6(-1.475,1) 7(-1.475,0.5) 8(-1.475,0) 9(-1.475,-0.5) 10(-1.475,-1)
  rect 0.28x0.28 smd paste-0.025 mask+0.07: 1(1.76,-1) 2(1.76,-0.5) 3(1.76,0) 4(1.76,0.5) 5(1.76,1) 6(-1.76,1) 7(-1.76,0.5) 8(-1.76,0) 9(-1.76,-0.5) 10(-1.76,-1)
  rect 0.25x0.7 smd paste-0.05 mask+0: 11(-0.6,-1.425) 11(-0.6,1.425) 11(-0.2,-1.425) 11(-0.2,1.425) 11(0.2,-1.425) 11(0.2,1.425) 11(0.6,-1.425) 11(0.6,1.425)
  rect 0.23x0.6 smd mask+0: 11(-0.6,-1.425) 11(-0.6,1.425) 11(-0.2,-1.425) 11(-0.2,1.425) 11(0.2,-1.425) 11(0.2,1.425) 11(0.6,-1.425) 11(0.6,1.425)
  round 0.6 hole 0.3 paste-2539.97 mask+0: 11(-0.5,-0.5) 11(-0.5,0.5) 11(0,0) 11(0.5,-0.5) 11(0.5,0.5)
  rect 0.65x0.9 smd mask+0: 11(-0.435,-0.56) 11(-0.435,0.56) 11(0.435,-0.56) 11(0.435,0.56)
  rect 1.7x2.15 smd paste-2.15 mask+0: 11(0,0)
  rect 2.3x2.3 smd far side paste-2.3 mask-2.3: 11(0.001,0)
  silkscreen extent -1.65,-1.65 1.65,1.65
TPS24750 [mil]
  rrect3% 11.81x19.98 smd mask+0: 1(126.87,72) 2(107.1,72) 3(87.42,72) 4(67.73,72) 5(48,72) 6(28.24,72) 7(8.55,72) 8(-11.13,72) 9(-29.13,72) 10(-48.9,72) 11(-68.58,72) 12(-88.27,72) 13(-108,72) 19(-108,-60) 20(-88.27,-60) 21(-68.58,-60) 22(-48.9,-60) 23(-29.13,-60) 24(-11.13,-60) 25(8.55,-60) 26(28.24,-60) 27(48,-60) 28(67.73,-60) 29(87.42,-60) 30(107.1,-60) 31(126.87,-60)
  rrect3% 19.98x11.81 smd mask+0: 14(-124,48) 15(-124,28.31) 16(-124,8.63) 17(-124,-12) 18(-124,-31.69) 32(144,-31.69) 33(144,-12) 34(144,8.63) 35(144,28.31) 36(144,48)
  rrect2% 151.02x88.58 smd mask+0: DRAIN(-28,6)
  rrect3% 59.61x88.58 smd mask+0: GND(92,6)
  silkscreen extent -148,-86 174,100
TRANS_NTJD1155LT1G [mm]
  rect 0.66x0.3 smd mask+0: 1(0.92,-0.65) 2(0.92,0) 3(0.92,0.65) 4(-0.92,0.65) 5(-0.92,0) 6(-0.92,-0.65)
  silkscreen extent -0.63,-1.12 1.83,1.12
TSSOP-20_4.4x6.5mm_P0.65mm [mm]
  rrect25% 1.475x0.4 smd mask+0: 1(2.863,-2.925) 2(2.863,-2.275) 3(2.863,-1.625) 4(2.863,-0.975) 5(2.863,-0.325) 6(2.863,0.325) 7(2.863,0.975) 8(2.863,1.625) 9(2.863,2.275) 10(2.863,2.925) 11(-2.863,2.925) 12(-2.863,2.275) 13(-2.863,1.625) 14(-2.863,0.975) 15(-2.863,0.325) 16(-2.863,-0.325) 17(-2.863,-0.975) 18(-2.863,-1.625) 19(-2.863,-2.275) 20(-2.863,-2.925)
  silkscreen extent -2.2,-3.38 3.6,3.38
WSON-6_1.5x1.5mm_P0.5mm [mm]
  rect 0.85x0.28 smd mask+0: 1(0.525,-0.5)
  rect 0.75x0.28 smd mask+0: 2(0.575,0) 3(0.575,0.5) 4(-0.575,0.5) 5(-0.575,0) 6(-0.575,-0.5)
  silkscreen extent -0.75,-0.85 0.94,0.85

## Part data
B1 B2 B3 B4: library part Keystone_54_18650, Sheetfile="File: cell_level_protection.kicad_sch", Sheetname="Cell Level Protection"
C1 C2 C3 C4 C5 C6 C7 C8 C9 C10 C11 C12 C13 C15 C20 C21 C22 C23 C24 C29: library part C_0402_1005Metric, "Capacitor SMD 0402 (1005 Metric), square (rectangular) end terminal, IPC_7351 nominal, (Body size source: IPC-SM-782 page 76, https://www.pcb-3d.com/wordpress/wp-content/uploads/ipc-sm-782a_amendment_1_and_2.pdf), generated with kicad-footprint-generator"
  C1: Sheetfile=battery_board_v2.kicad_sch
  C2 C3 C4 C5 C6 C7 C9: Sheetfile=mcu.kicad_sch, Sheetname=MCU
  C8 C10 C11 C12 C13 C15 C23 C29: Sheetfile=inhibits.kicad_sch, Sheetname="Power Control and RBF"
  C20: Sheetfile=VI_monitor.kicad_sch, Sheetname="Voltage and Current Monitor"
  C21 C22 C24: Sheetfile=inhibits2.kicad_sch, Sheetname=Inhibits
C14 C16 C17 C18 C19 C25 C26 C27 C28 C30 C31: library part C_0603_1608Metric, "Capacitor SMD 0603 (1608 Metric), square (rectangular) end terminal, IPC_7351 nominal, (Body size source: IPC-SM-782 page 76, https://www.pcb-3d.com/wordpress/wp-content/uploads/ipc-sm-782a_amendment_1_and_2.pdf), generated with kicad-footprint-generator"
  C14: Sheetfile=inhibits.kicad_sch, Sheetname="Power Control and RBF"
  C16 C17 C18 C19 C25 C26 C27 C28 C30 C31: Sheetfile=cell_level_protection.kicad_sch, Sheetname="Cell Level Protection"
F1 F2: library part 1210L450-polyfuse, Sheetfile=cell_level_protection.kicad_sch, Sheetname="Cell Level Protection"
FB1: library part L_0603_1608Metric, "Inductor SMD 0603 (1608 Metric), square (rectangular) end terminal, IPC_7351 nominal, (Body size source: http://www.tortai-tech.com/upload/download/2011102023233369053.pdf), generated with kicad-footprint-generator", Sheetfile=battery_board_v2.kicad_sch
FB2: library part L_0402_1005Metric, "Inductor SMD 0402 (1005 Metric), square (rectangular) end terminal, IPC_7351 nominal, (Body size source: http://www.tortai-tech.com/upload/download/2011102023233369053.pdf), generated with kicad-footprint-generator", Sheetfile=mcu.kicad_sch, Sheetname=MCU
G***: library part Logo-10mm
H1 H2 H3 H4: library part MountingHole_3.2mm_M3_Pad_TopBottom, "Mounting Hole 3.2mm, M3", Sheetfile=battery_board_v2.kicad_sch
H5 H6 H7 H8: library part MountingHole_2.2mm_M2_DIN965_Pad, "Mounting Hole 2.2mm, M2, DIN965", Sheetfile=battery_board_v2.kicad_sch
J1: library part pc104-connector, Sheetfile=battery_board_v2.kicad_sch
J2: library part PinSocket_2x05_P2.54mm_Vertical, "Through hole straight socket strip, 2x05, 2.54mm pitch, double cols (from Kicad 4.0.7), script generated", Sheetfile=mcu.kicad_sch, Sheetname=MCU
J3: library part PinSocket_2x06_P2.54mm_Vertical, "Through hole straight socket strip, 2x06, 2.54mm pitch, double cols (from Kicad 4.0.7), script generated", Sheetfile=mcu.kicad_sch, Sheetname=MCU
J4: library part M80-5300842, Sheetfile=inhibits.kicad_sch, Sheetname="Power Control and RBF"
J5 J6: library part PinHeader_1x02_P2.00mm_Horizontal, "Through hole angled pin header, 1x02, 2.00mm pitch, 4.2mm pin length, single row", Sheetfile=inhibits.kicad_sch, Sheetname="Power Control and RBF"
J7 J9: library part PinHeader_1x03_P2.00mm_Horizontal, "Through hole angled pin header, 1x03, 2.00mm pitch, 4.2mm pin length, single row", Sheetfile=inhibits.kicad_sch, Sheetname="Power Control and RBF"
J8: library part PinHeader_1x02_P2.00mm_Vertical, "Through hole straight pin header, 1x02, 2.00mm pitch, single row", Sheetfile=cell_level_protection.kicad_sch, Sheetname="Cell Level Protection"
JP1 JP2 JP3 JP4: library part SolderJumper-2_P1.3mm_Open_Pad1.0x1.5mm, "SMD Solder Jumper, 1x1.5mm Pads, 0.3mm gap, open"
  JP1 JP2: Sheetfile=inhibits.kicad_sch, Sheetname="Power Control and RBF"
  JP3 JP4: Sheetfile=battery_board_v2.kicad_sch
L1 L2: library part L_0805_2012Metric_Pad1.15x1.40mm_HandSolder, "Inductor SMD 0805 (2012 Metric), square (rectangular) end terminal, IPC_7351 nominal with elongated pad for handsoldering. (Body size source: https://docs.google.com/spreadsheets/d/1BsfQQcO9C6DZCsRaXUlFlo91Tg2WpOkGARC1WS5S8t0/edit?usp=sharing), generated with kicad-footprint-generator"
  L1: Sheetfile=inhibits.kicad_sch, Sheetname="Power Control and RBF"
  L2: Sheetfile=cell_level_protection.kicad_sch, Sheetname="Cell Level Protection"
Q1 Q2 Q3 Q4 Q5 Q6 Q7 Q8 Q9 Q10: library part TDSON-8-1, "Power MOSFET package, TDSON-8-1, 5.15x5.9mm (https://www.infineon.com/cms/en/product/packages/PG-TDSON/PG-TDSON-8-1/)"
  Q1 Q2: Sheetfile=battery_board_v2.kicad_sch
  Q3 Q4 Q5 Q6 Q7 Q8 Q9 Q10: Sheetfile=cell_level_protection.kicad_sch, Sheetname="Cell Level Protection"
Q11: library part TRANS_NTJD1155LT1G, MANUFACTURER="ON Semiconductor", MAXIMUM_PACKAGE_HEIGHT=1.1mm, PARTREV="Rev. 6", STANDARD="Manufacturer recommendations", Sheetfile=inhibits2.kicad_sch, Sheetname=Inhibits
R1 R2 R6 R7 R9 R10 R11 R12 R14 R15 R16 R17 R20 R21 R22 R23 R36 R37: library part R_0402_1005Metric, "Resistor SMD 0402 (1005 Metric), square (rectangular) end terminal, IPC_7351 nominal, (Body size source: IPC-SM-782 page 72, https://www.pcb-3d.com/wordpress/wp-content/uploads/ipc-sm-782a_amendment_1_and_2.pdf), generated with kicad-footprint-generator"
  R1 R2 R6 R7: Sheetfile=battery_board_v2.kicad_sch
  R9: Sheetfile=mcu.kicad_sch, Sheetname=MCU
  R10 R11 R12 R14 R15 R16 R17 R20 R21 R22 R23: Sheetfile=inhibits.kicad_sch, Sheetname="Power Control and RBF"
  R36 R37: Sheetfile=inhibits2.kicad_sch, Sheetname=Inhibits
R3 R8: library part R_Axial_DIN0207_L6.3mm_D2.5mm_P7.62mm_Horizontal, "Resistor, Axial_DIN0207 series, Axial, Horizontal, pin pitch=7.62mm, 0.25W = 1/4W, length*diameter=6.3*2.5mm^2, http://cdn-reichelt.de/documents/datenblatt/B400/1_4W%23YAG.pdf", Sheetfile=battery_board_v2.kicad_sch
R13 R18 R19 R24 R25 R26 R27 R28 R29 R30 R31 R32 R33 R34 R35: library part R_0603_1608Metric, "Resistor SMD 0603 (1608 Metric), square (rectangular) end terminal, IPC_7351 nominal, (Body size source: IPC-SM-782 page 72, https://www.pcb-3d.com/wordpress/wp-content/uploads/ipc-sm-782a_amendment_1_and_2.pdf), generated with kicad-footprint-generator"
  R13: Sheetfile=inhibits.kicad_sch, Sheetname="Power Control and RBF"
  R18 R19 R24 R25 R26 R27 R28 R29 R30 R31 R32 R33: Sheetfile=cell_level_protection.kicad_sch, Sheetname="Cell Level Protection"
  R34 R35: Sheetfile=VI_monitor.kicad_sch, Sheetname="Voltage and Current Monitor"
TP1 TP2 TP3 TP4 TP6: library part TestPoint_THTPad_D2.0mm_Drill1.0mm, "THT pad as test Point, diameter 2.0mm, hole diameter 1.0mm", Sheetfile=inhibits.kicad_sch, Sheetname="Power Control and RBF"
U1 U12: library part SOIC-8_3.9x4.9mm_P1.27mm, "SOIC, 8 Pin (JEDEC MS-012AA, https://www.analog.com/media/en/package-pcb-resources/package/pkg_pdf/soic_narrow-r/r_8.pdf), generated with kicad-footprint-generator ipc_gullwing_generator.py"
  U1: Sheetfile=battery_board_v2.kicad_sch
  U12: Sheetfile=VI_monitor.kicad_sch, Sheetname="Voltage and Current Monitor"
U2: library part TSSOP-20_4.4x6.5mm_P0.65mm, "TSSOP, 20 Pin (JEDEC MO-153 Var AC https://www.jedec.org/document_search?search_api_views_fulltext=MO-153), generated with kicad-footprint-generator ipc_gullwing_generator.py", Sheetfile=mcu.kicad_sch, Sheetname=MCU
U3 U7: library part Texas_S-PWSON-N10_ThermalVias, "3x3mm Body, 0.5mm Pitch, S-PWSON-N10, DSC, http://www.ti.com/lit/ds/symlink/tps63060.pdf"
  U3: Sheetfile=inhibits.kicad_sch, Sheetname="Power Control and RBF"
  U7: Sheetfile=cell_level_protection.kicad_sch, Sheetname="Cell Level Protection"
U4 U5: library part DFN-6_DCB_LIT, MANUFACTURER="Analog Devices Inc.", MAXIMUM_PACKAGE_HEIGHT=1.0mm, PARTREV="Rev. B", STANDARD="IPC 7351B", Sheetfile=inhibits.kicad_sch, Sheetname="Power Control and RBF"
U6: library part SOT-353_SC-70-5_Handsoldering, "SOT-353, SC-70-5, Handsoldering", Sheetfile=inhibits.kicad_sch, Sheetname="Power Control and RBF"
U8 U9 U10 U11: library part WSON-6_1.5x1.5mm_P0.5mm, "WSON6, http://www.ti.com/lit/ds/symlink/tlv702.pdf", Sheetfile=cell_level_protection.kicad_sch, Sheetname="Cell Level Protection"
Y1: library part Crystal_SMD_3225-4Pin_3.2x2.5mm, "SMD Crystal SERIES SMD3225/4 http://www.txccrystal.com/images/pdf/7m-accuracy.pdf, 3.2x2.5mm^2 package", Sheetfile=mcu.kicad_sch, Sheetname=MCU
U13: Sheetfile=inhibits2.kicad_sch, Sheetname=Inhibits

## Via types
v1: diameter 0.7, hole 0.3, F.Cu to B.Cu, tented both sides, 93 vias
v2: diameter 0.8, hole 0.4, F.Cu to B.Cu, tented both sides, 17 vias
v3: diameter 0.7, hole 0.4, F.Cu to B.Cu, tented both sides, 3 vias

## Nets (pads, with @x,y where several pads share a name; then routed paths per layer and width w, separated by ;. In a path a pad name is that pad's centre, name@x,y a point inside that pad or via, vN(x,y) a via of type N, cw(c..) or ccw(c..) an arc to the next point about the centre after c; other vN are vias at no path point)
3V3_CON: C10.1 C11.1 C12.1 C14.2 C15.1 C23.1 JP2.2 R11.1 R14.1 R17.1 R20.1 TP2.1 U3.9 U4.5 U5.5 U6.5 | length 17.4
  B.Cu w0.3: R17.1@146.304,33.329 147.318,33.329 v1(147.32,33.331) ; v1(146.558,38.919) R20.1@147.318,38.919 ; v1(148.59,40.951) C12.1@149.606,40.951 149.634,40.923 C23.1@149.634,38.919 149.35,38.635 U3.9@149.35,37.488 ; JP2.2@180.958,45.335 180.958,46.903 v1(181.102,47.047) ; v1(181.356,38.665) C11.1@181.356,37.875 181.384,37.903 U5.5@182.812,37.903 ; R11.1@183.898,35.617 184.787,35.617 v1(184.912,35.492) ; U6.5@188.61,51.679 189.973,51.679 190.246,51.952 191.359,51.952 v1(191.372,51.939) ; v1(188.976,44.253) C10.1@188.976,43.435 189.032,43.491 U4.5@190.322,43.491 ; R14.1@191.264,41.205 191.899,41.205 v1(192.024,41.08)
3V3A: C7.1 FB2.1 U2.5 | length 2.6
  B.Cu w0.3: U2.5@125.75,66.688 127.176,66.688 C7.1@127.259,66.605 127.259,65.594 FB2.1@127.254,65.589
3V3BUS: C1.1 C5.1 C6.1 C9.1 C20.2 FB2.2 J1.79 J1.80 J2.4 J2.7 J3.1 JP3.2 R3.2 R8.2 R34.2 R35.2 U1.8 U2.16 U12.5 | length 32.1
  In2.Cu w0.3: J2.4@111.272,76.989 112.472,75.789 112.472,73.249 J2.7@113.812,71.909
  B.Cu w0.25: R8.2@136.725,60.713 v2(136.725,62.453) ; U1.8@161.115,46.128 161.492,46.128 161.497,46.123 162.36,46.123 162.81,46.573 162.81,51.369 162.052,52.127 JP3.2@161.178,52.127
  B.Cu w0.3: v1(116.332,66.605) 116.36,66.577 C5.1@117.348,66.577 117.459,66.688 U2.16@120.025,66.688 ; FB2.2@128.224,65.589 128.224,64.578 C9.1@128.219,64.573 128.219,63.608 v1(128.27,63.557) ; v1(140.716,53.905) 140.907,54.096 R35.2@141.986,54.096 ; v1(140.716,58.731) 140.779,58.794 R34.2@141.986,58.794 ; U12.5@149.038,57.179 C20.2@150.876,57.179 151.864,57.179 v1(151.892,57.207) ; U1.8@161.036,46.031 161.036,45.297 C1.1@160.5,44.761 v1(161.544,44.761)
  B.Cu w0.5: v2(176.9,62.588) 176.91,62.578 R3.2@176.91,60.803
5V0_CHG: C30.1 C31.1 J3.2 J3.12 U7.2 U7.3 | length 58.2
  F.Cu w0.5: J3.12@111.526,19.844 111.526,18.45 112.647,17.329 118.11,17.329 119.126,18.345 119.126,35.109 126.492,42.475 v3(126.492,42.983)
  B.Cu w0.25: J3.12@111.625,19.763 110.46,19.763 109.93,20.293 109.93,31.893 110.5,32.463 J3.2@111.625,32.463 ; U7.3@126.1,47.488 U7.2@126.6,47.488
  B.Cu w0.3: U7.3@126.1,47.488 126.1,46.169 C31.1@126.492,45.777
  B.Cu w0.5: v3(126.492,42.983) C30.1@126.492,44.253 C31.1@126.492,45.777
5V_USB_CHG: J1.32
5VBUS: J1.77 J1.78 | length 2.5
  F.Cu w0.3: J1.78@156.21,89.973 J1.77@156.21,92.513
BAT_HTR_1: R1.1 U2.10 | length 48.6
  F.Cu w0.3: v1(131.826,63.557) v1(172.212,63.557)
  B.Cu w0.3: U2.10@125.799,63.426 125.799,62.726 125.984,62.541 128.27,62.541 129.286,63.557 v1(131.826,63.557) ; v1(172.212,63.557) R1.1@173.226,63.557
BAT_HTR_2: R6.1 U2.11 | length 36.7
  B.Cu w0.3: U2.11@120.025,63.438 121.699,63.438 121.699,60.82 124.056,58.463 131.065,58.463 133.65,55.878 133.65,40.743 133.95,40.443 135.636,40.443 135.892,40.699 R6.1@135.892,41.459
BAT_INT: J1.7 U2.14 | length 93
  F.Cu w0.25: v2(121.412,66.097) 121.412,66.98 120.396,67.996 120.396,83.995 121.92,85.519 121.92,98.101 122.822,99.003 177.66,99.003 J1.7@179.07,97.593
  B.Cu w0.25: U2.14@120.025,65.388 120.915,65.388 121.412,65.885 v2(121.412,66.097)
BAT_TEMP: U1.1 U2.12 | length 55.9
  F.Cu w0.25: v2(121.618,64.27) 123.445,66.097 128.016,66.097 128.524,65.589 153.416,65.589 v1(154.432,64.573)
  B.Cu w0.25: U2.12@120.025,64.088 121.436,64.088 v2(121.618,64.27) ; v1(154.432,64.573) 154.432,46.539 154.843,46.128 156.165,46.128 U1.1@156.065,46.028